# Altium PCB TopControl.PcbDoc
Units mil, origin at the board's own origin, x right, y up, seen from the top; angles counter-clockwise.
Board outline 6000 x 4000 mil, 2 copper layers (Top Layer, Bottom Layer); 43 components, 36 nets, 253 pads, 0 vias.
Unrouted connection lines stored in the file: 59.
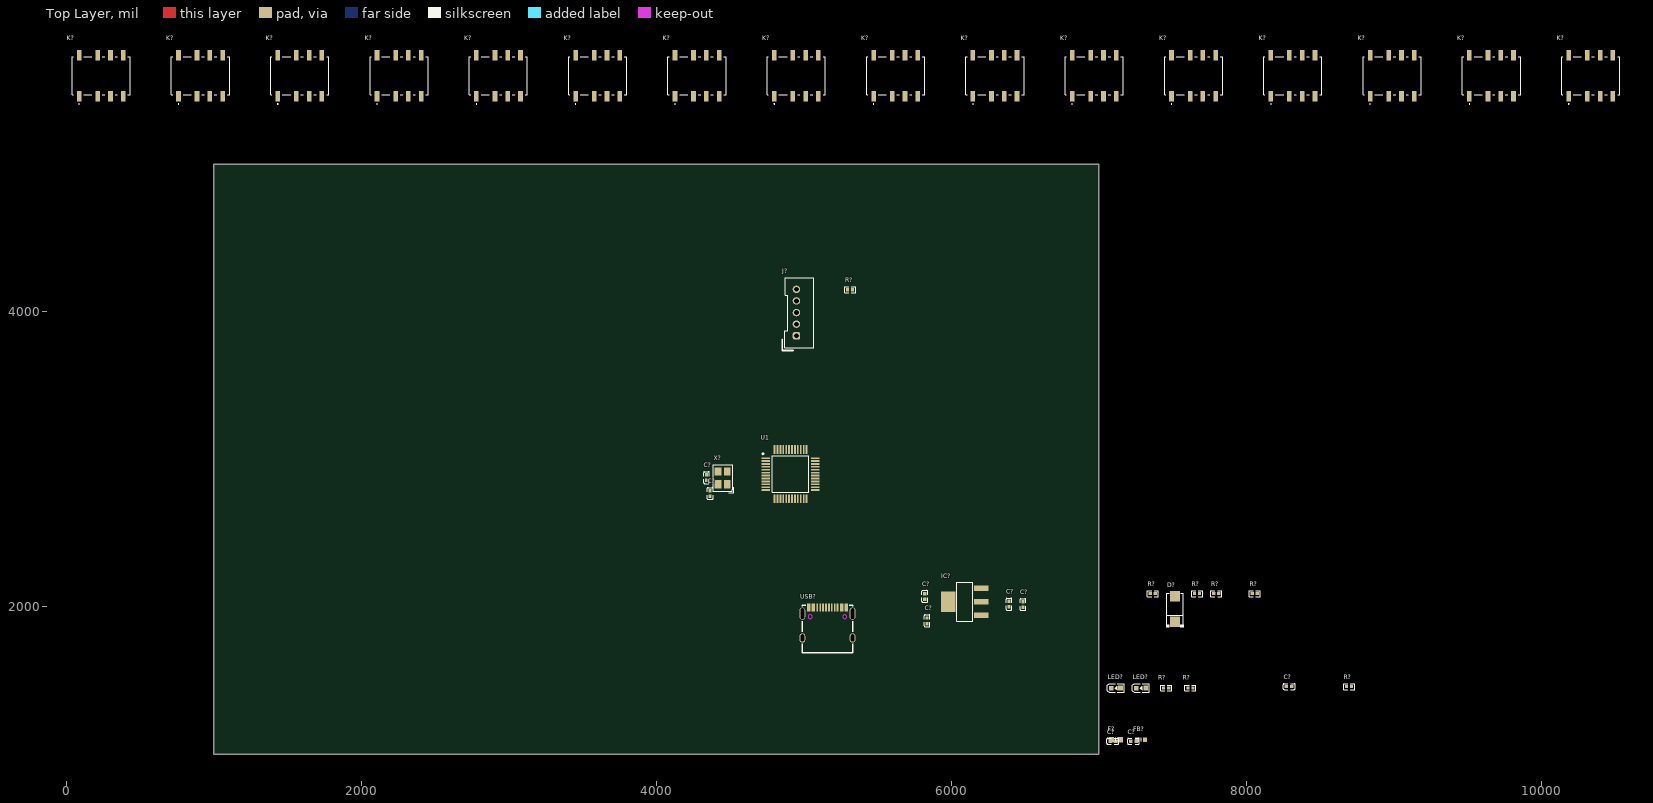
[diagram p0: Top Layer view]
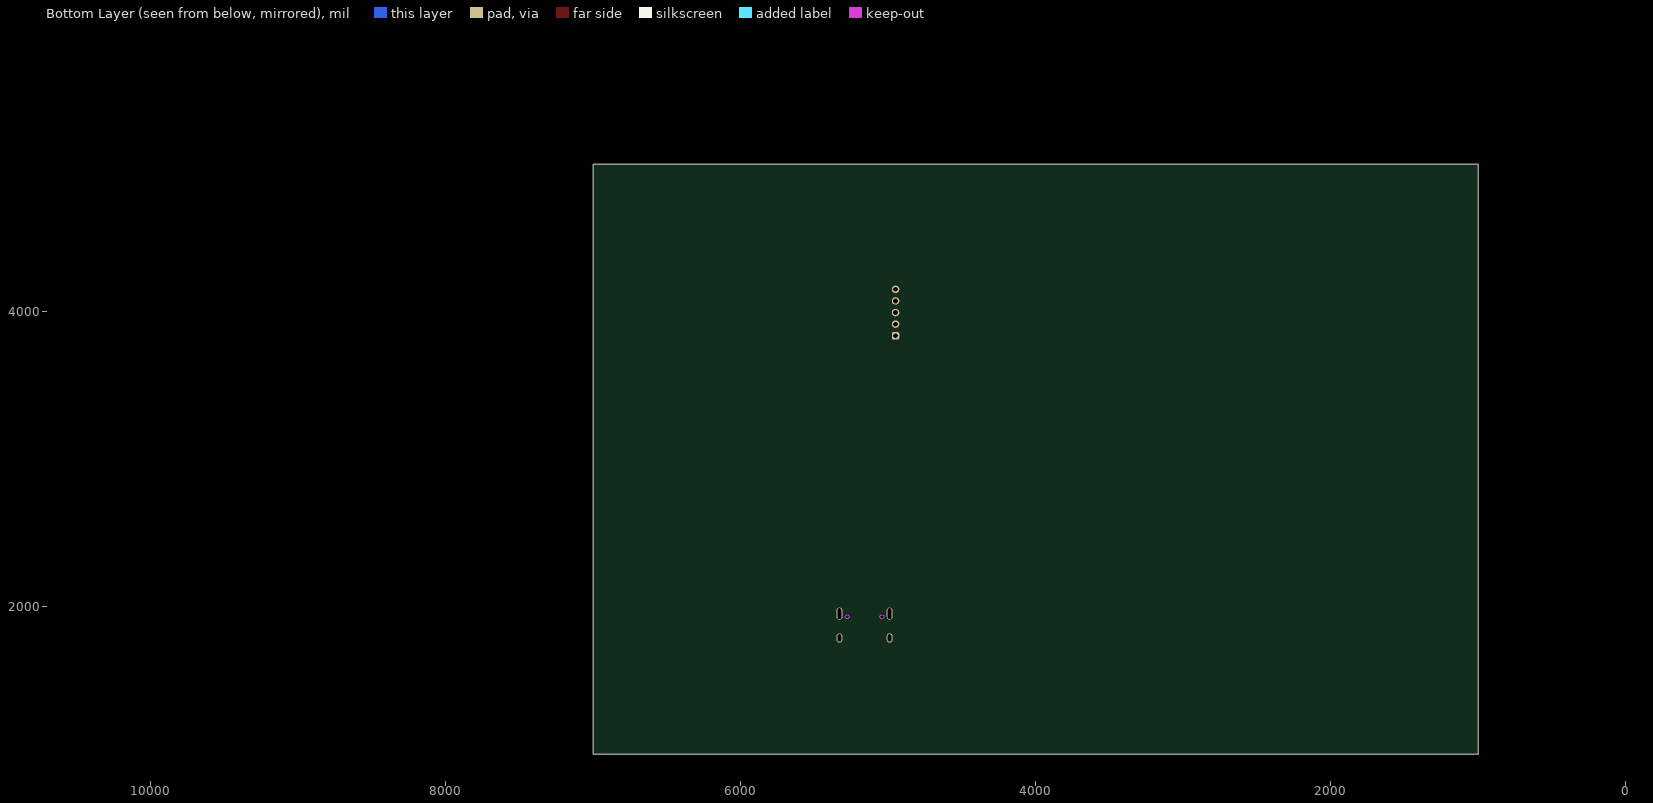
[diagram p1: Bottom Layer view, seen from below]

## Layer stack, top to bottom
Top Solder: solder mask 0.4, Solder Resist, Dk 3.5
Top Layer: signal copper 1.4
Dielectric 1: dielectric 12.6, FR-4, Dk 4.8
Bottom Layer: signal copper 1.4
Bottom Solder: solder mask 0.4, Solder Resist, Dk 3.5

## Board outline
1000,1000 7000,1000 7000,5000 1000,5000

## Design rules (kind name [scope] priority, off if disabled: settings)
Clearance [All] p1: gap=10 ignorepadtopadclearanceinfootprint=FALSE
PolygonConnect [All] p1: connectstyle=Relief reliefconductorwidth=10 reliefentries=4 polygonreliefangle="90 Angle" airgapwidth=10
RoutingVias [All] p1: holewidth=28 width=50 viastyle="Through Hole" minholewidth=28 minwidth=50 maxholewidth=28 maxwidth=50
SolderMaskExpansion [All] p1: expansion=4 istentingtop=FALSE
SupplyNets "Schematic Supply Nets_3" [InNet('VCC3V3_SYS')] p1: voltage=0.000
SupplyNets "Schematic Supply Nets_2" [InNet('VCC5V0_SYS')] p2: voltage=0.000
SupplyNets "Schematic Supply Nets_1" [InNet('USB_5V')] p3: voltage=0.000
SupplyNets "Schematic Supply Nets" [InNet('GND')] p4: voltage=0.000
Width [All] p1: maxlimit=10 minlimit=10 preferedwidth=10
30 further rules are at their usual default settings.

## Classes and differential pairs
component class U_Power: C? IC?
net class relayCtrl[1..16]: relayCtrl1 relayCtrl2 relayCtrl3 relayCtrl4 relayCtrl5 relayCtrl6 relayCtrl7 relayCtrl8 relayCtrl9 relayCtrl10 relayCtrl11 relayCtrl12 relayCtrl13 relayCtrl14 relayCtrl15 relayCtrl16
component class U_Relay: K?
component class U_Port: D? F? FB? J? R? USB?
component class U_MCU: C? LED? R? U1 X?

## Components (designator, comment, footprint, x,y, rotation, side; value= is the part's Value field where it differs from the comment)
C? "4.7uF ±10% 10V X5R" C0402 7075,1090 r0 top
C? "100nF ±10% 50V X7R" C0402 7215,1090 r0 top
C? "4.7uF ±10% 10V X5R" C0402 6485,1997.6 r90 top
C? "10pF ±5%_X7R" C0402 4340,2857.6 r90 top
C? "100nF ±10% 50V X7R" C0402 5835,1887.6 r90 top
C? "100nF ±10% 50V X7R" C0402 8270,1460 r0 top
C? "100nF ±10% 50V X7R" C0402 6390,2000 r90 top
C? "4.7uF ±10% 10V X5R" C0402 5820,2052.6 r90 top
C? "10pF ±5%_X7R" C0402 4365,2750 r90 top
D? "B340A-13-F" SMA_L4.4-W2.6-LS5.0-RD 7515,1985 r90 top
F? "0603L035YR" FUSC1608X75N 7115,1100 r0 top
FB? "1K±25%@100MHz" BLM18SP221SN1B 7285,1100 r0 top value=10uH
IC? "AMS1117-3.3" SOT-223-4_L6.5-W3.5-P2.30-LS7.0-BR 6090,2035 r0 top
J? "NC" "JST_PH 2.00-5" 4950,3837.52 r90 top
K? "G6K-2F-Y__DC3" G6K2FYDC3 8987.19,5600 r0 top
K? "G6K-2F-Y__DC3" G6K2FYDC3 1584.19,5600 r0 top
K? "G6K-2F-Y__DC3" G6K2FYDC3 8314.19,5600 r0 top
K? "G6K-2F-Y__DC3" G6K2FYDC3 4949.19,5600 r0 top
K? "G6K-2F-Y__DC3" G6K2FYDC3 2930.19,5600 r0 top
K? "G6K-2F-Y__DC3" G6K2FYDC3 4276.19,5600 r0 top
K? "G6K-2F-Y__DC3" G6K2FYDC3 10333.19,5600 r0 top
K? "G6K-2F-Y__DC3" G6K2FYDC3 9660.19,5600 r0 top
K? "G6K-2F-Y__DC3" G6K2FYDC3 3603.19,5600 r0 top
K? "G6K-2F-Y__DC3" G6K2FYDC3 7641.19,5600 r0 top
K? "G6K-2F-Y__DC3" G6K2FYDC3 6968.19,5600 r0 top
K? "G6K-2F-Y__DC3" G6K2FYDC3 5622.19,5600 r0 top
K? "G6K-2F-Y__DC3" G6K2FYDC3 6295.19,5600 r0 top
K? "G6K-2F-Y__DC3" G6K2FYDC3 2257.19,5600 r0 top
K? "G6K-2F-Y__DC3" G6K2FYDC3 911.19,5600 r0 top
K? "G6K-2F-Y__DC3" G6K2FYDC3 238.19,5600 r0 top
LED? "GREEN" LED0603-RD 7285,1450 r0 top
LED? "GREEN" LED0603-RD 7115,1450 r0 top
R? "5.1kΩ ±1% 62.5mW" R0402 7620,1450 r0 top
R? "10KΩ ±1% 62.5mW" R0402 5312.96,4150 r0 top
R? "10KΩ ±1% 62.5mW" R0402 7455,1450 r0 top
R? "5.1kΩ ±1% 62.5mW" R0402 8695,1460 r0 top
R? "10KΩ ±1% 62.5mW" R0402 7795,2090 r0 top
R? "22Ω ±1% 62.5mW" R0402 8055,2090 r0 top
R? "22Ω ±1% 62.5mW" R0402 7665,2090 r0 top
R? "10KΩ ±1% 62.5mW" R0402 7365,2090 r0 top
U1 "STM32G030C6T6" QFP50P900X900X160-48N 4910,2900 r0 top
USB? "USB-C 16P" USB-C-16P 5160,1890 r0 top
X? "8MHz ±10ppm_10pF" CRYSTAL_3225 4450,2875 r90 top

## Footprints (in the part's own frame and the unit in brackets; to place one, negate y for a bottom-side part, rotate by r counter-clockwise, add the part's x,y. Pads: shape width x height; smd on the part's side, far side on the other; paste and mask are expansions set on the pad)
BLM18SP221SN1B [mm]
  rect 0.65x0.7 smd: 1(-0.675,0) 2(0.675,0)
  silkscreen extent 0,-0.3 0,0.3, body extent -0.8,-0.4 0.8,0.4, height 0.8
C0402 [mm]
  rect 0.6x0.55 smd paste-100 mask+0.051: 1(0,0) 2(0.95,0)
  silkscreen extent -0.55,-0.5 1.5,0.5, body extent -0.02,-0.25 0.98,0.25, height 0.5
CRYSTAL_3225 [mm] "4P-L3.2-W2.5-BL-2"
  rect 1.4x1.15 smd paste+0 mask+0.051: 1(-1.1,-0.8) 3(1.1,0.8) G(-1.1,0.8) G(1.1,-0.8)
  silkscreen extent -2.54,-1.9 2.29,1.65, body extent -1.6,-1.26 1.6,1.24, height 0.81
FUSC1608X75N [mm]
  rect 0.95x1.02 smd: 1(-0.785,0) 2(0.785,0)
  silkscreen extent 0,-0.3 0,0.3, body extent -0.8,-0.4 0.8,0.4, height 0.75
G6K2FYDC3 [mm]
  rect 0.8x1.8 smd: 1(-3.8,-3.5) 2(-0.6,-3.5) 3(1.6,-3.5) 4(3.8,-3.5) 5(3.8,3.5) 6(1.6,3.5) 7(-0.6,3.5) 8(-3.8,3.5)
  silkscreen extent -5,-4.9 5,3.25, body extent -5,-4.32 5,4.32, height 5.5
"JST_PH 2.00-5" [mm]
  rrect50% 1.3x1.3 hole 0.8 mask+0.127: 1(0,0)
  round 1.3 hole 0.8 mask+0.127: 2(2,0) 3(4,0) 4(6,0) 5(8,0)
  silkscreen extent -2.51,-3 10,2.44
LED0603-RD [mm]
  rect 0.8x0.8 smd paste+0 mask+0.051: 1(0.799,0.003) 2(-0.799,-0.003)
  silkscreen extent -1.49,-0.75 1.39,0.76, body extent -0.81,-0.41 0.81,0.41, height 0.56
QFP50P900X900X160-48N [mm]
  rect 1.475x0.3 smd: 1(-4.238,2.75) 2(-4.238,2.25) 3(-4.238,1.75) 4(-4.238,1.25) 5(-4.238,0.75) 6(-4.238,0.25) 7(-4.238,-0.25) 8(-4.238,-0.75) 9(-4.238,-1.25) 10(-4.238,-1.75) 11(-4.238,-2.25) 12(-4.238,-2.75) 25(4.238,-2.75) 26(4.238,-2.25) 27(4.238,-1.75) 28(4.238,-1.25) 29(4.238,-0.75) 30(4.238,-0.25) 31(4.238,0.25) 32(4.238,0.75) 33(4.238,1.25) 34(4.238,1.75) 35(4.238,2.25) 36(4.238,2.75)
  rect 0.3x1.475 smd: 13(-2.75,-4.238) 14(-2.25,-4.238) 15(-1.75,-4.238) 16(-1.25,-4.238) 17(-0.75,-4.238) 18(-0.25,-4.238) 19(0.25,-4.238) 20(0.75,-4.238) 21(1.25,-4.238) 22(1.75,-4.238) 23(2.25,-4.238) 24(2.75,-4.238) 37(2.75,4.238) 38(2.25,4.238) 39(1.75,4.238) 40(1.25,4.238) 41(0.75,4.238) 42(0.25,4.238) 43(-0.25,4.238) 44(-0.75,4.238) 45(-1.25,4.238) 46(-1.75,4.238) 47(-2.25,4.238) 48(-2.75,4.238)
  silkscreen extent -4.85,-3.15 3.15,3.62, body extent -4.5,-4.5 4.5,4.5, height 1.6
R0402 [mm]
  rect 0.566x0.54 smd mask+0.051: 1(-0.433,0) 2(0.433,0)
  silkscreen extent -0.94,-0.5 0.94,0.5, body extent -0.5,-0.25 0.5,0.25, height 0.5
SMA_L4.4-W2.6-LS5.0-RD [mm]
  rect 1.8x1.7 smd paste+0 mask+0.051: 1(-2.192,0) 2(2.192,0)
  silkscreen extent -3.11,-1.48 2.73,1.48, body extent -2.6,-1.24 2.6,1.26, height 2.1
SOT-223-4_L6.5-W3.5-P2.30-LS7.0-BR [mm]
  rect 2.47x0.98 smd: 1(2.835,-2.3) 2(2.835,0) 3(2.835,2.3)
  rect 2.47x3.6 smd: 4(-2.835,0)
  silkscreen extent -1.37,-3.33 1.37,3.33, body extent -3.35,-3.15 3.35,3.15, height 1.8
USB-C-16P [mm]
  oval 1.001x1.6 hole 0.599 slot 1.199 at 90 deg paste-2539.97 mask+0.051: 0(-4.321,-2.548) 0(4.321,-2.548)
  oval 1.001x2.101 hole 0.599 slot 1.801 at 90 deg paste-2539.97 mask+0.051: 0(-4.321,1.633) 0(4.321,1.633)
  rect 0.3x1.45 smd: A1(-3.071,2.7) A4(-2.309,2.7) A5(-1.25,2.7) A6(-0.25,2.7) A7(0.25,2.7) A8(1.25,2.7) A9(2.291,2.7) A12(3.079,2.7) B1(3.384,2.7) B4(2.596,2.7) B5(1.75,2.7) B6(0.75,2.7) B7(-0.75,2.7) B8(-1.75,2.7) B9(-2.614,2.7) B12(-3.376,2.7)
  Keep-Out Layer board cut-out: 3.33,1.102 3.33,1.172 3.277,1.301 3.178,1.4 3.049,1.453 2.91,1.453 2.781,1.4 2.682,1.301 2.629,1.172 2.629,1.102 2.629,1.033 2.682,0.904 2.781,0.805 2.91,0.752 3.049,0.752 3.178,0.805 3.277,0.904 3.33,1.033 3.33,1.102
  Keep-Out Layer board cut-out: -2.629,1.102 -2.629,1.172 -2.682,1.301 -2.781,1.4 -2.91,1.453 -3.049,1.453 -3.178,1.4 -3.277,1.301 -3.33,1.172 -3.33,1.102 -3.33,1.033 -3.277,0.904 -3.178,0.805 -3.049,0.752 -2.91,0.752 -2.781,0.805 -2.682,0.904 -2.629,1.033 -2.629,1.102
  silkscreen extent -4.32,-5.08 4.32,3.05, body extent -4.49,-5.02 4.44,2.73, height 3.29

## Part data
C? C? C?: library part Cap, "CL05A475KP5NRNC", LatestRevisionDate=17-Jul-2002, LatestRevisionNote="Re-released for DXP Platform.", PackageDescription="Radial Cap, Thru-Hole; 2 Leads; 0.3 in Pin Spacing", PackageReference=RAD-0.3, Published=8-Jun-2000, Publisher="Altium Limited"
C? C? C? C?: library part Cap, "CL05B104KO5NNNC", LatestRevisionDate=17-Jul-2002, LatestRevisionNote="Re-released for DXP Platform.", PackageDescription="Radial Cap, Thru-Hole; 2 Leads; 0.3 in Pin Spacing", PackageReference=RAD-0.3, Published=8-Jun-2000, Publisher="Altium Limited"
C? C?: library part Cap, "Capacitor", LatestRevisionDate=17-Jul-2002, LatestRevisionNote="Re-released for DXP Platform.", PackageDescription="Radial Cap, Thru-Hole; 2 Leads; 0.3 in Pin Spacing", PackageReference=RAD-0.3, Published=8-Jun-2000, Publisher="Altium Limited"
D?: library part Diode_Schottky, "直流反向耐压(Vr):40V;平均整流电流(Io):3A;正向压降(Vf):500mV@3A;", Average Rectified Current (Io)=3A, Forward Voltage (Vf@If)=500mV@3A, JLCPCB Part Class=扩展库, LCSC Part Name="40V 3A 500mV@3A", Manufacturer=DIODES(美台), Reverse Voltage (Vr)=40V, Add into BOM=yes, Convert to PCB=yes, Datasheet=https://atta.szlcsc.com/upload/public/pdf/source/20171023/C134454_15087453575121052549.pdf, Device=B340A-13-F, Manufacturer Part=B340A-13-F, Name=B340A-13-F, Supplier=LCSC, Supplier Footprint=SMA(DO-214AC), Supplier Part=C85098, Symbol=B340A-13-F
F?: "Fuse", Manufacturer_Name=LITTELFUSE, Mouser Part Number=576-0603L035YR, Arrow Part Number=0603L035YR, Arrow Price/Stock=https://www.arrow.com/en/products/0603l035yr/littelfuse?region=europe, Datasheet Link=https://www.littelfuse.com/~/media/electronics/datasheets/resettable_ptcs/littelfuse_ptc_0603l_datasheet.pdf.pdf, Height=0.75mm, Manufacturer_Part_Number=0603L035YR, Mouser Price/Stock=https://www.mouser.co.uk/ProductDetail/Littelfuse/0603L035YR?qs=PalBzRKzfnvD8ztzU42n%2Fw%3D%3D
FB?: library part Inductor, "BLM21AG102SN1D", Code_IEC=1005, Code_JEITA=0402, LatestRevisionDate=29-May-2009, LatestRevisionNote="IPC-7351 Footprint Added.", PackageDescription="Chip Inductor", PackageReference=0402-A, Published=8-Jun-2000, Publisher="Altium Limited"
IC?: "Integrated Circuit", Manufacturer_Name=Advanced, Datasheet Link=https://datasheet.datasheetarchive.com/originals/distributors/Datasheets-28/DSA-550594.pdf, Height=1.8mm, Manufacturer_Part_Number=AMS1117-3.3
J?: library part "JST_PH 2.00-5", "品牌：JST 型号：B5B-PH-K-S，直插，间距2.00，5pin", 制造商=JST, 名称=插座2针，2.0间距, 物料编号=B5B-PH-K-S
K? K? K? K? K? K? K? K? K? K? K? K? K? K? K? K?: "Relay or Contactor", Manufacturer_Name="Omron Electronics", Manufacturer_Part_Number="G6K-2F-Y  DC3", Datasheet Link=https://omronfs.omron.com/en_US/ecb/products/pdf/en-g6k.pdf, Height=5.4mm
LED? LED?: library part LED, "发光颜色:", Emitted Color=红灯, JLCPCB Part Class="Extended Part", Manufacturer=EVERLIGHT(亿光), Manufacturer Part=17-21SURC/S530-A2/TR8, Add into BOM=yes, Convert to PCB=yes, Datasheet=https://atta.szlcsc.com/upload/public/pdf/source/20170918/C131244_1505726880590976254.pdf, Device=17-21SURC/S530-A2/TR8, LCSC Part Name=红灯, Name=17-21SURC/S530-A2/TR8, Supplier=LCSC, Supplier Footprint=0805, Supplier Part=C131244, Symbol=17-21SURC/S530-A2/TR8
R? R? R? R?: library part Res, "Resistor", LatestRevisionDate=17-Jul-2002, LatestRevisionNote="Re-released for DXP Platform.", PackageDescription="Axial Device, Thru-Hole; 2 Leads; 0.3 in Pin Spacing", PackageReference=AXIAL-0.3, Published=8-Jun-2000, Publisher="Altium Limited"
R? R? R? R?: library part R-0603, "0402WGF1002TCE"
U1: "Integrated Circuit", Manufacturer_Name=STMicroelectronics, Mouser Part Number=511-STM32G030C6T6, Arrow Part Number=STM32G030C6T6, Arrow Price/Stock=https://www.arrow.com/en/products/stm32g030c6t6/stmicroelectronics?utm_currency=USD&region=nac, Datasheet Link=https://datasheet.datasheetarchive.com/originals/distributors/Datasheets_SAMA/41d698f2d3eefcd1331311559e90da5e.pdf, Height=1.6mm, Manufacturer_Part_Number=STM32G030C6T6, Mouser Price/Stock=https://www.mouser.co.uk/ProductDetail/STMicroelectronics/STM32G030C6T6?qs=uwxL4vQweFNhONHhoas%2FMg%3D%3D
X?: library part CRYSTAL, "Crystal 8MHz ±10ppm 10pF 200 Ohm -10°C ~ 60°C Surface Mount 4-SMD, No Lead (DFN, LCC)", Frequency Stability=±10ppm, Load Capacitance=10pF, Manufacturer="Abracon LLC", Manufacturer Part Number=ABM3B-8.000MHZ-10-1-U-T, Operating Mode=Fundamental, Operating Temperature="-10°C ~ 60°C", Package / Case="4-SMD, No Lead", Ratings=-, Supplier Part Number 1=535-9721-1-ND, Category="Crystals, Oscillators, Resonators", ComponentLink1Description=http://www.abracon.com/Resonators/abm3b.pdf, ComponentLink1URL=http://www.abracon.com/Resonators/abm3b.pdf, Frequency Tolerance=±10ppm, Height - Seated (Max)="0.043\" (1.10mm)", Mounting Type="Surface Mount", Packaging="Cut Tape (CT)", Part Status=Active, Pricing 1="1=0.69, 10=0.578, 50=0.5198, 100=0.462, 500=0.4389 (USD)", Pricing 2="1000=0.336, 3000=0.315, 5000=0.3045, 10000=0.294 (USD)", RoHS="RoHS Compliant", Size / Dimension="0.197\" L x 0.126\" W (5.00mm x 3.20mm)", Stock=35437, Supplier 1=Digi-Key, Supplier 2=Digi-Key, Supplier Part Number 2=535-9721-2-ND, Type="MHz Crystal"

## Nets (pads, with @x,y where several pads share a name; then routed paths per layer and width w, separated by ;. In a path a pad name is that pad's centre, name@x,y a point inside that pad or via, vN(x,y) a via of type N, cw(c..) or ccw(c..) an arc to the next point about the centre after c; other vN are vias at no path point)
GND: C?.1@5820,2052.6 C?.1@5835,1887.6 C?.1@6390,2000 C?.1@6485,1997.6 C?.1@7075,1090 C?.1@7215,1090 C?.1@8270,1460 C?.2@4340,2895 C?.2@4365,2787.4 IC?.1 J?.3 LED?.2@7083.52,1449.87 R?.1@7437.96,1450 R?.1@7602.96,1450 R?.2@8712.04,1460 U1.7 USB?.0 USB?.A1 USB?.A12 USB?.B1 USB?.B12 X?.G
LEDIndicate: LED?.2@7253.52,1449.87 U1.14
NetC?_2: C?.2@8307.4,1460 U1.10
NetD?_2: D?.2 FB?.2
NetF?_2: F?.2 FB?.1
NetJ?_2: J?.2
NetJ?_4: J?.4 R?.1@5295.92,4150
NetJ?_5: J?.5
NetLED?_1: LED?.1@7316.48,1450.13 R?.2@7812.04,2090
NetR?_1: R?.1@8677.96,1460 USB?.B5
NetR?_2: R?.2@7637.04,1450 USB?.A5
OSC_N: C?.1@4365,2750 U1.9 X?.1
OSC_P: C?.1@4340,2857.6 U1.8 X?.3
relayCtrl1: U1.15
relayCtrl2: U1.16
relayCtrl3: U1.17
relayCtrl4: U1.18
relayCtrl5: U1.19
relayCtrl6: U1.20
relayCtrl7: U1.21
relayCtrl8: U1.22
relayCtrl9: U1.28
relayCtrl10: U1.29
relayCtrl11: U1.32
relayCtrl12: U1.33
relayCtrl13: U1.44
relayCtrl14: U1.45
relayCtrl15: U1.46
relayCtrl16: U1.47
SWCLK: R?.2@7472.04,1450 U1.36
SWDIO: U1.35
USB_5V: F?.1 USB?.A4 USB?.A9 USB?.B4 USB?.B9
USB_DN: R?.1@7647.96,2090 USB?.A7 USB?.B7
USB_DP: R?.1@8037.96,2090 USB?.A6 USB?.B6
VCC3V3_SYS: C?.2@5820,2090 C?.2@5835,1925 C?.2@7112.4,1090 C?.2@7252.4,1090 IC?.2 IC?.4 J?.1 R?.2@5330,4150 U1.6
VCC5V0_SYS: C?.2@6390,2037.4 C?.2@6485,2035 D?.1 IC?.3 R?.1@7347.96,2090 R?.1@7777.96,2090
pads on no net: K?.1 K?.2 K?.3 K?.4 K?.5 K?.6 K?.7 K?.8 LED?.1@7146.48,1450.13 R?.2@7382.04,2090 R?.2@7682.04,2090 R?.2@8072.04,2090 U1.1 U1.2 U1.3 U1.4 U1.5 U1.11 U1.12 U1.13 U1.23 U1.24 U1.25 U1.26 U1.27 U1.30 U1.31 U1.34 U1.37 U1.38 U1.39 U1.40 U1.41 U1.42 U1.43 U1.48 USB?.A8 USB?.B8